# Altium PCB PCB_BearlyML Carrier Board_2022-12-21.pcbdoc (part 1 of 2)
Units mm, origin at the board's own origin, x right, y up, seen from the top; angles counter-clockwise.
Board outline 241.4 x 137.4 mm, 2 copper layers (Top Layer, Bottom Layer); 88 components, 113 nets, 672 pads, 238 vias.
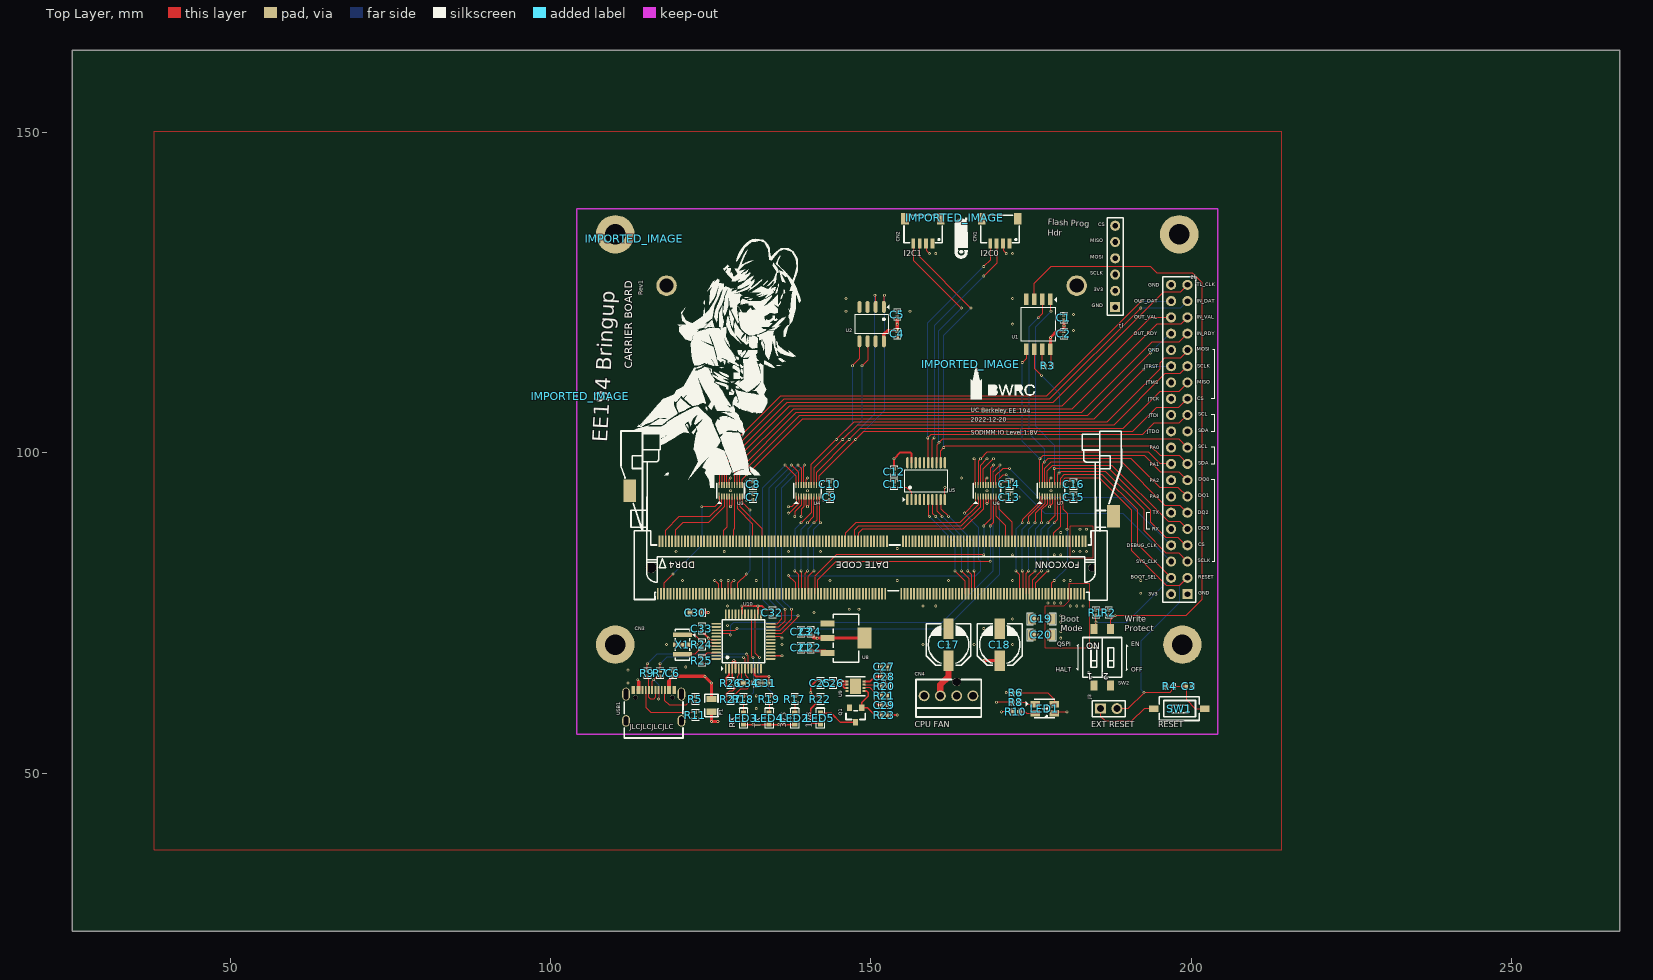
[diagram p0: Top Layer view]
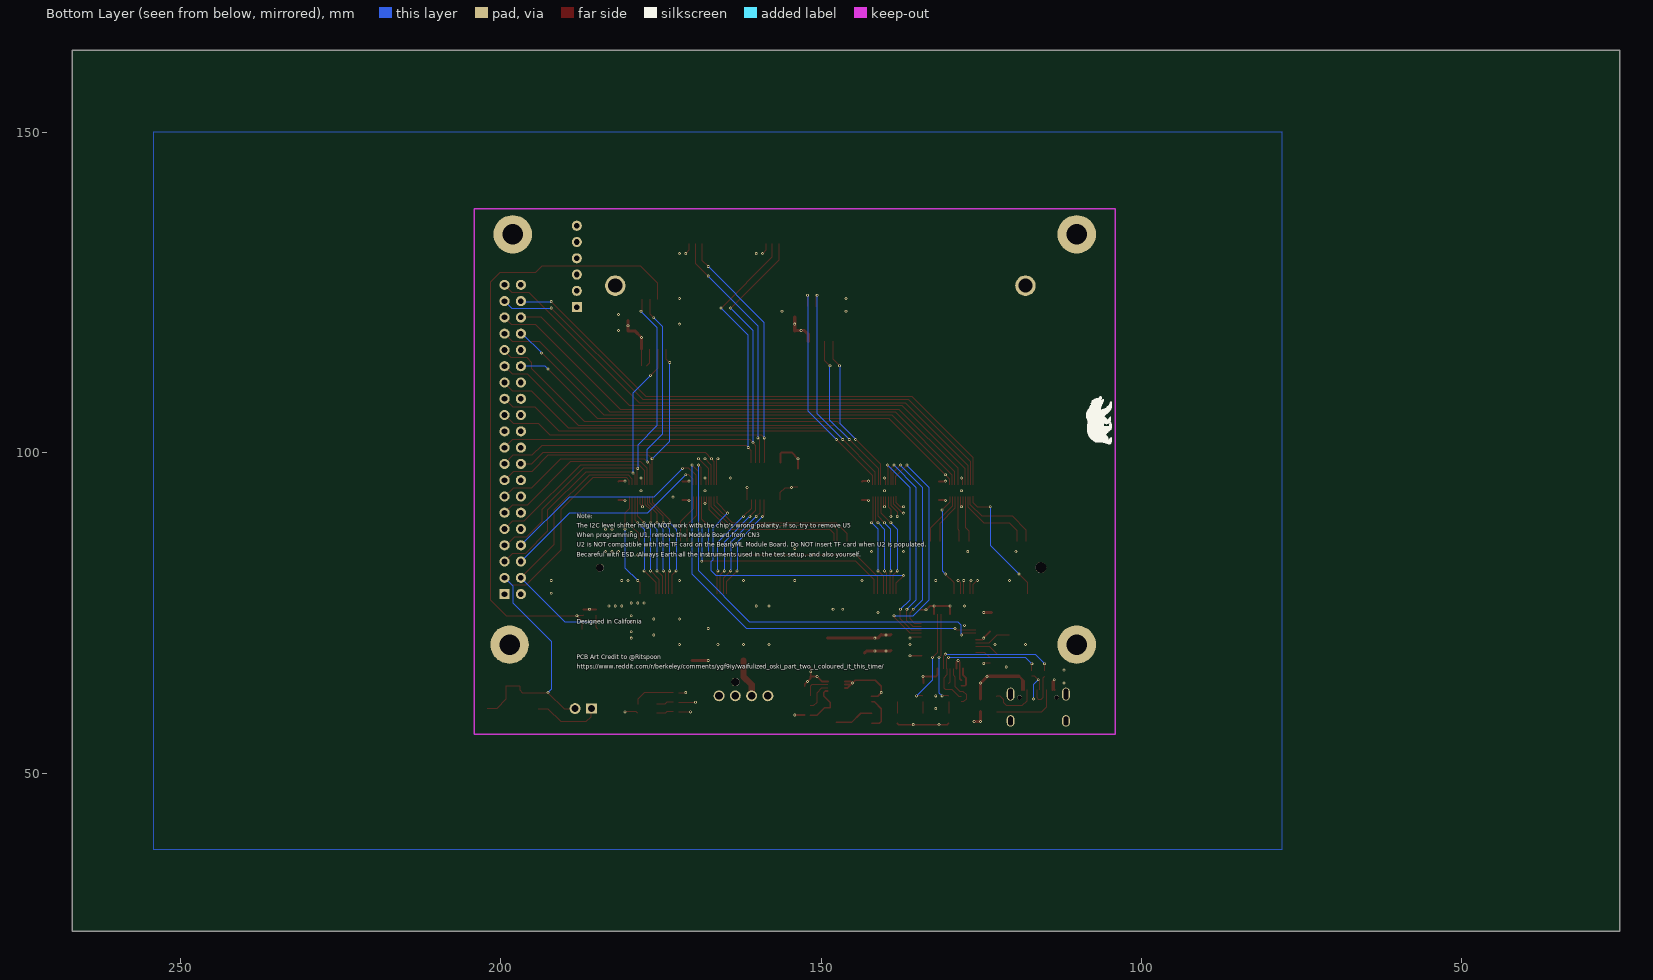
[diagram p1: Bottom Layer view, seen from below]

## Layer stack, top to bottom
Top Layer: signal copper (thickness not stored)
Dielectric: dielectric 0.32, FR-4, Dk 4.8
Bottom Layer: signal copper (thickness not stored)

## Board outline
266.8,25.4 25.4,25.4 25.4,162.8 266.8,162.8

## Components (designator, comment, footprint, x,y, rotation, side; value= is the part's Value field where it differs from the comment)
C1 "100n" CAPA-0402 180.098,121.101 r270 top
C2 "1u" CAPA-0402 180.098,118.601 r90 top
C3 "100n" CAPA-0402 199.599,63.6 r180 top
C4 "100n" CAPA-0402 154.1,118.6 r90 top
C5 "1u" CAPA-0402 154.1,121.6 r270 top
C6 "10n" CAPA-0402 119.099,65.599 r270 top
C7 "100n" CAPA-0402 131.601,93.1 r270 top
C8 "100n" CAPA-0402 131.601,95.099 r90 top
C9 "100n" CAPA-0402 143.6,93.1 r270 top
C10 "100n" CAPA-0402 143.6,95.099 r90 top
C11 "100n" CAPA-0402 153.6,95.099 r270 top
C12 "100n" CAPA-0402 153.6,97.1 r90 top
C13 "100n" CAPA-0402 171.601,93.1 r270 top
C14 "100n" CAPA-0402 171.601,95.099 r90 top
C15 "100n" CAPA-0402 181.601,93.1 r270 top
C16 "100n" CAPA-0402 181.601,95.099 r90 top
C17 "220u" CAPPR5.0-D6.3_L6.6_W6.6 162.099,70.1 r270 top
C18 "220u" CAPPR5.0-D6.3_L6.6_W6.6 170.1,70.1 r270 top
C19 "22u" CAPA-1206 176.6,74.1 r0 top
C20 "22u" CAPA-1206 176.6,71.601 r0 top
C21 "100n" CAPA-0402 139.099,69.6 r270 top
C22 "10u" CAPA-0402 140.6,69.6 r270 top
C23 "10u" CAPA-0402 139.099,72.099 r270 top
C24 "100n" CAPA-0402 140.6,72.099 r270 top
C25 "10u" CAPA-0402 142.099,64.1 r90 top
C26 "100n" CAPA-0402 144.1,64.1 r90 top
C27 "100n" CAPA-0402 152.099,66.6 r180 top
C28 "10u" CAPA-0402 152.099,65.099 r180 top
C29 "1n" CAPA-0402 152.099,60.6 r180 top
C30 "10u" CAPA-0603 122.599,75.099 r0 top
C31 "100n" CAPA-0402 133.6,64.1 r0 top
C32 "100n" CAPA-0402 134.601,75.099 r90 top
C33 "100n" CAPA-0402 123.6,72.599 r270 top
C34 "33n" CAPA-0603 130.849,64.1 r180 top
CN1 "SM04B-SRSS-TB(LF)(SN)" CONN-SMD_4P-P1.00_SM04B-SRSS-TB-LF-SN 170.099,134.601 r180 top
CN2 "SM04B-SRSS-TB(LF)(SN)" CONN-SMD_4P-P1.00_SM04B-SRSS-TB-LF-SN 158.101,134.601 r180 top
CN3 "ASAA826-E8SB0-7H" CONN-SMD_ASAA826-E8SB0-7H 150.1,82.1 r180 top
CN4 "47053-1000" CONN-TH_47053-1000 162.099,62.099 r180 top
F1 "6V 2A" R0805 125.1,60.6 r270 top
IMPORTED_IMAGE "IMPORTED_IMAGE" IMPORTED_IMAGE 104.616,108.831 r0 top
IMPORTED_IMAGE "IMPORTED_IMAGE" IMPORTED_IMAGE 165.6,113.85 r0 top
IMPORTED_IMAGE "IMPORTED_IMAGE" IMPORTED_IMAGE 113.063,133.452 r0 top
IMPORTED_IMAGE "IMPORTED_IMAGE" IMPORTED_IMAGE 163.068,136.714 r0 top
J1 "HDR-M-2.54_1x6" HDR-M-2.54_1X6 188.101,129.099 r90 top
J2 "HDR-M-2.54_2x20" HDR-M-2.54_2X20 198.101,102.099 r90 top
J3 "HDR-M-2.54_1x2" HDR-M-2.54_1X2 187.1,60.1 r0 top
LED1 "LED-RGB" LED-ARRAY-SMD_4P-L3.2-W2.7-TL-RD_TJ-S3528 177.1,60.1 r0 top
LED2 "LED-0603_R" LED-0603 138.101,58.599 r90 top
LED3 "LED-0603_W" LED-0603 130.1,58.599 r90 top
LED4 "LED-0603_W" LED-0603 134.1,58.599 r90 top
LED5 "LED-0603_B" LED-0603 142.099,58.599 r90 top
Q1 "FDV301N" SOT-23_L2.9-W1.3-P1.90-LS2.4-BR 147.6,59.1 r90 top
R1 "10k" RES-0402 185.101,75.099 r90 top
R2 "10k" RES-0402 187.1,75.099 r90 top
R3 "10k" RES-0402 177.598,113.6 r0 top
R4 "10k" RES-0402 196.6,63.6 r0 top
R5 "5k1" RES-0402 122.599,61.601 r270 top
R6 "1k" RES-0402 172.599,62.599 r180 top
R7 "27R" RES-0402 117.1,65.6 r90 top
R8 "1k" RES-0402 172.599,61.101 r180 top
R9 "27R" RES-0402 115.101,65.599 r90 top
R10 "1k" RES-0402 172.599,59.6 r180 top
R11 "5k1" RES-0402 122.599,59.099 r270 top
R17 "1k" RES-0402 138.101,61.601 r270 top
R18 "1k" RES-0402 130.1,61.601 r270 top
R19 "1k" RES-0402 134.1,61.601 r270 top
R20 "160k" RES-0402 152.099,63.6 r0 top
R21 "47k" RES-0402 152.099,62.099 r180 top
R22 "1k" RES-0402 142.099,61.601 r90 top
R23 "10k" RES-0402 152.099,59.099 r0 top
R24 "1M" RES-0402 123.6,70.1 r270 top
R25 "470R" RES-0402 123.6,67.601 r90 top
R26 "10k" RES-0402 128.101,64.1 r270 top
R27 "1k5" RES-0402 128.101,61.601 r270 top
SW1 "TS-1007S-AR02516" SW-SMD_L6.1-W3.6-LS7.9 198.1,60.1 r180 top
SW2 "KF1027B-02P-L00-ON-01B" SW-SMD_4P-L6.1-W6.2-P2.54-LS10.0 186.1,68.1 r0 top
U1 "IS25LP032D-JBLA3" SOIC-8_L5.3-W5.3-P1.27-LS7.9-BL 176.1,120.1 r180 top
U2 "APS6404L-3SQR-SN" SOP-8_L4.9-W3.9-P1.27-LS6.0-BL 150.1,120.099 r180 top
U3 "TXB0108DQSR" SON-20_L4.0-W2.0-P0.40-BL 128.1,94.099 r0 top
U4 "TXB0108DQSR" SON-20_L4.0-W2.0-P0.40-BL 140.099,94.099 r0 top
U5 "TXS0108EPWR" TSSOP-20_L6.5-W4.4-P0.65-LS6.4-BL 158.599,95.599 r0 top
U6 "TXB0108DQSR" SON-20_L4.0-W2.0-P0.40-BL 168.1,94.099 r0 top
U7 "TXB0108DQSR" SON-20_L4.0-W2.0-P0.40-BL 178.1,94.099 r0 top
U8 "AMS1117-3.3" SOT-223_L6.5_W3.5_P2.30_BL 146.099,71.101 r270 top
U9 "MCP1726-ADJE/MF" DFN-8_L3.0-W3.0-P0.50-LS3.0-BL-EP 147.599,63.601 r270 top
U10 "FT2232D" LQFP-48_L7.0-W7.0-P0.50-LS9.0-BL 130.1,70.6 r0 top
USB1 "USB-TYPEC" USB-C-SMD_KH-TYPE-C-16P 116.1,60.6 r0 top
X1 "6MHz" CRYSTAL-SMD_3P-L4.5-W2.0-L 120.6,70.1 r270 top

## Footprints (in the part's own frame and the unit in brackets; to place one, negate y for a bottom-side part, rotate by r counter-clockwise, add the part's x,y. Pads: shape width x height; smd on the part's side, far side on the other; paste and mask are expansions set on the pad)
CAPA-0402 [mm]
  rect 0.566x0.54 smd: 1(-0.433,0) 2(0.433,0)
  silkscreen extent -0.87,-0.5 0.87,0.5
CAPA-0603 [mm]
  rect 0.9x0.8 smd: 1(-0.8,0) 2(0.8,0)
  silkscreen extent -1.5,-0.62 1.5,0.62
CAPA-1206 [mm]
  rect 1.208x1.701 smd: 1(-1.479,0) 2(1.479,0)
  silkscreen extent -2.25,-1 2.25,1
CAPPR5.0-D6.3_L6.6_W6.6 [mm]
  rect 3.2x1.6 smd: 1(2.5,0) 2(-2.5,0)
  silkscreen extent -3.25,-3.5 3.25,3.5
CONN-SMD_4P-P1.00_SM04B-SRSS-TB-LF-SN [mm]
  rect 0.6x1.55 smd: 1(-1.5,1.938) 2(-0.5,1.938) 3(0.501,1.938) 4(1.5,1.938)
  rect 1.2x1.8 smd: 5(2.8,-1.938) 6(-2.8,-1.938)
  silkscreen extent -3.02,-2.46 2.96,1.8
CONN-SMD_ASAA826-E8SB0-7H [mm]
  rect 0.3x1.8 smd: 1(33.375,4.1) 2(33.125,-4.1) 3(32.875,4.1) 4(32.625,-4.1) 5(32.375,4.1) 6(32.125,-4.1) 7(31.875,4.1) 8(31.625,-4.1) 9(31.375,4.1) 10(31.125,-4.1) 11(30.875,4.1) 12(30.625,-4.1) 13(30.375,4.1) 14(30.125,-4.1) 15(29.875,4.1) 16(29.625,-4.1) 17(29.375,4.1) 18(29.125,-4.1) 19(28.875,4.1) 20(28.625,-4.1) 21(28.375,4.1) 22(28.125,-4.1) 23(27.875,4.1) 24(27.625,-4.1) 25(27.375,4.1) 26(27.125,-4.1) 27(26.875,4.1) 28(26.625,-4.1) 29(26.375,4.1) 30(26.125,-4.1) 31(25.875,4.1) 32(25.625,-4.1) 33(25.375,4.1) 34(25.125,-4.1) 35(24.875,4.1) 36(24.625,-4.1) 37(24.375,4.1) 38(24.125,-4.1) 39(23.875,4.1) 40(23.625,-4.1) 41(23.375,4.1) 42(23.125,-4.1) 43(22.875,4.1) 44(22.625,-4.1) 45(22.375,4.1) 46(22.125,-4.1) 47(21.875,4.1) 48(21.625,-4.1) 49(21.375,4.1) 50(21.125,-4.1) 51(20.875,4.1) 52(20.625,-4.1) 53(20.375,4.1) 54(20.125,-4.1) 55(19.875,4.1) 56(19.625,-4.1) 57(19.375,4.1) 58(19.125,-4.1) 59(18.875,4.1) 60(18.625,-4.1) 61(18.375,4.1) 62(18.125,-4.1) 63(17.875,4.1) 64(17.625,-4.1) 65(17.375,4.1) 66(17.125,-4.1) 67(16.875,4.1) 68(16.625,-4.1) 69(16.375,4.1) 70(16.125,-4.1) 71(15.875,4.1) 72(15.625,-4.1) 73(15.375,4.1) 74(15.125,-4.1) 75(14.875,4.1) 76(14.625,-4.1) 77(14.375,4.1) 78(14.125,-4.1) 79(13.875,4.1) 80(13.625,-4.1) 81(13.375,4.1) 82(13.125,-4.1) 83(12.875,4.1) 84(12.625,-4.1) 85(12.375,4.1) 86(12.125,-4.1) 87(11.875,4.1) 88(11.625,-4.1) 89(11.375,4.1) 90(11.125,-4.1) 91(10.875,4.1) 92(10.625,-4.1) 93(10.375,4.1) 94(10.125,-4.1) 95(9.875,4.1) 96(9.625,-4.1) 97(9.375,4.1) 98(9.125,-4.1) 99(8.875,4.1) 100(8.625,-4.1) 101(8.375,4.1) 102(8.125,-4.1) 103(7.875,4.1) 104(7.625,-4.1) 105(7.375,4.1) 106(7.125,-4.1) 107(6.875,4.1) 108(6.625,-4.1) 109(6.375,4.1) 110(6.125,-4.1) 111(5.875,4.1) 112(5.625,-4.1) 113(5.375,4.1) 114(5.125,-4.1) 115(4.875,4.1) 116(4.625,-4.1) 117(4.375,4.1) 118(4.125,-4.1) 119(3.875,4.1) 120(3.625,-4.1) 121(3.375,4.1) 122(3.125,-4.1) 123(2.875,4.1) 124(2.625,-4.1) 125(2.375,4.1) 126(2.125,-4.1) 127(1.875,4.1) 128(1.625,-4.1) 129(1.375,4.1) 130(1.125,-4.1) 131(0.875,4.1) 132(0.625,-4.1) 133(0.375,4.1) 134(0.125,-4.1) 135(-0.125,4.1) 136(-0.375,-4.1) 137(-0.625,4.1) 138(-0.875,-4.1) 139(-1.125,4.1) 140(-1.375,-4.1) 141(-1.625,4.1) 142(-1.875,-4.1) 143(-2.125,4.1) 144(-2.375,-4.1) 145(-4.625,4.1) 146(-4.875,-4.1) 147(-5.125,4.1) 148(-5.375,-4.1) 149(-5.625,4.1) 150(-5.875,-4.1) 151(-6.125,4.1) 152(-6.375,-4.1) 153(-6.625,4.1) 154(-6.875,-4.1) 155(-7.125,4.1) 156(-7.375,-4.1) 157(-7.625,4.1) 158(-7.875,-4.1) 159(-8.125,4.1) 160(-8.375,-4.1) 161(-8.625,4.1) 162(-8.875,-4.1) 163(-9.125,4.1) 164(-9.375,-4.1) 165(-9.625,4.1) 166(-9.875,-4.1) 167(-10.125,4.1) 168(-10.375,-4.1) 169(-10.625,4.1) 170(-10.875,-4.1) 171(-11.125,4.1) 172(-11.375,-4.1) 173(-11.625,4.1) 174(-11.875,-4.1) 175(-12.125,4.1) 176(-12.375,-4.1) 177(-12.625,4.1) 178(-12.875,-4.1) 179(-13.125,4.1) 180(-13.375,-4.1) 181(-13.625,4.1) 182(-13.875,-4.1) 183(-14.125,4.1) 184(-14.375,-4.1) 185(-14.625,4.1) 186(-14.875,-4.1) 187(-15.125,4.1) 188(-15.375,-4.1) 189(-15.625,4.1) 190(-15.875,-4.1) 191(-16.125,4.1) 192(-16.375,-4.1) 193(-16.625,4.1) 194(-16.875,-4.1) 195(-17.125,4.1) 196(-17.375,-4.1) 197(-17.625,4.1) 198(-17.875,-4.1) 199(-18.125,4.1) 200(-18.375,-4.1) 201(-18.625,4.1) 202(-18.875,-4.1) 203(-19.125,4.1) 204(-19.375,-4.1) 205(-19.625,4.1) 206(-19.875,-4.1) 207(-20.125,4.1) 208(-20.375,-4.1) 209(-20.625,4.1) 210(-20.875,-4.1) 211(-21.125,4.1) 212(-21.375,-4.1) 213(-21.625,4.1) 214(-21.875,-4.1) 215(-22.125,4.1) 216(-22.375,-4.1) 217(-22.625,4.1) 218(-22.875,-4.1) 219(-23.125,4.1) 220(-23.375,-4.1) 221(-23.625,4.1) 222(-23.875,-4.1) 223(-24.125,4.1) 224(-24.375,-4.1) 225(-24.625,4.1) 226(-24.875,-4.1) 227(-25.125,4.1) 228(-25.375,-4.1) 229(-25.625,4.1) 230(-25.875,-4.1) 231(-26.125,4.1) 232(-26.375,-4.1) 233(-26.625,4.1) 234(-26.875,-4.1) 235(-27.125,4.1) 236(-27.375,-4.1) 237(-27.625,4.1) 238(-27.875,-4.1) 239(-28.125,4.1) 240(-28.375,-4.1) 241(-28.625,4.1) 242(-28.875,-4.1) 243(-29.125,4.1) 244(-29.375,-4.1) 245(-29.625,4.1) 246(-29.875,-4.1) 247(-30.125,4.1) 248(-30.375,-4.1) 249(-30.625,4.1) 250(-30.875,-4.1) 251(-31.125,4.1) 252(-31.375,-4.1) 253(-31.625,4.1) 254(-31.875,-4.1) 255(-32.125,4.1) 256(-32.375,-4.1) 257(-32.625,4.1) 258(-32.875,-4.1) 259(-33.125,4.1) 260(-33.375,-4.1)
  rect 2x3.5 smd: 261(37.75,-12) 262(-37.75,-8)
  round 1.2 hole 1.2 unplated: ""(-34.4,0)
  round 1.7 hole 1.7 unplated: ""(34.4,0)
  silkscreen extent -38.98,-21.33 39.11,5.1
CONN-TH_47053-1000 [mm]
  round 1.7 hole 1.2: 1(3.81,0) 2(1.27,0) 3(-1.27,0) 4(-3.81,0)
  round 1.3 hole 1.3 unplated: ""(-1.27,-2.16)
  silkscreen extent -5.08,-2.54 5.08,3.3
CRYSTAL-SMD_3P-L4.5-W2.0-L [mm]
  rect 0.7x3 smd: 1(-1.5,0) 2(0,0) 3(1.5,0)
  silkscreen extent -2.41,-1.14 2.41,2
DFN-8_L3.0-W3.0-P0.50-LS3.0-BL-EP [mm]
  rect 0.3x0.5 smd: 1(-0.75,-1.325) 2(-0.25,-1.325) 3(0.25,-1.325) 4(0.75,-1.325) 5(0.75,1.325) 6(0.25,1.325) 7(-0.25,1.325) 8(-0.75,1.325)
  rect 2.4x1.7 smd: 9(0,-0.025)
  silkscreen extent -1.5,-2.25 1.5,1.48
HDR-M-2.54_1X2 [mm]
  rect 1.7x1.575 hole 1.1: 1(-1.27,0)
  round 1.7 hole 1.1: 2(1.27,0)
  silkscreen extent -2.54,-1.27 2.54,1.27
HDR-M-2.54_1X6 [mil]
  rect 62x62 hole 35: 1(-250,0)
  round 62 hole 35: 2(-150,0) 3(-50,0) 4(50,0) 5(150,0) 6(250,0)
  silkscreen extent -300,-50 300,50
HDR-M-2.54_2X20 [mil]
  rect 62x62 hole 35: 1(-950,-50)
  round 62 hole 35: 2(-950,50) 3(-850,-50) 4(-850,50) 5(-750,-50) 6(-750,50) 7(-650,-50) 8(-650,50) 9(-550,-50) 10(-550,50) 11(-450,-50) 12(-450,50) 13(-350,-50) 14(-350,50) 15(-250,-50) 16(-250,50) 17(-150,-50) 18(-150,50) 19(-50,-50) 20(-50,50) 21(50,-50) 22(50,50) 23(150,-50) 24(150,50) 25(250,-50) 26(250,50) 27(350,-50) 28(350,50) 29(450,-50) 30(450,50) 31(550,-50) 32(550,50) 33(650,-50) 34(650,50) 35(750,-50) 36(750,50) 37(850,-50) 38(850,50) 39(950,-50) 40(950,50)
  silkscreen extent -1000,-100 1000,100
IMPORTED_IMAGE [mm]
LED-0603 [mm]
  rect 0.9x0.8 smd: 1(-0.8,0) 2(0.8,0)
  silkscreen extent -1.51,-0.69 1.7,0.69
LED-ARRAY-SMD_4P-L3.2-W2.7-TL-RD_TJ-S3528 [mm]
  rect 1.5x1 smd: 1(-1.5,0.7) 2(-1.5,-0.7) 3(1.5,0.7) 4(1.5,-0.7)
  silkscreen extent -2.94,-1.44 1.61,1.44
LQFP-48_L7.0-W7.0-P0.50-LS9.0-BL [mm]
  oval 0.27x1.5 smd: 1(-2.75,-4.25) 2(-2.25,-4.25) 3(-1.75,-4.25) 4(-1.25,-4.25) 5(-0.75,-4.25) 6(-0.25,-4.25) 7(0.25,-4.25) 8(0.75,-4.25) 9(1.25,-4.25) 10(1.75,-4.25) 11(2.25,-4.25) 12(2.75,-4.25) 25(2.75,4.25) 26(2.25,4.25) 27(1.75,4.25) 28(1.25,4.25) 29(0.75,4.25) 30(0.25,4.25) 31(-0.25,4.25) 32(-0.75,4.25) 33(-1.25,4.25) 34(-1.75,4.25) 35(-2.25,4.25) 36(-2.75,4.25)
  oval 1.5x0.27 smd: 13(4.25,-2.75) 14(4.25,-2.25) 15(4.25,-1.75) 16(4.25,-1.25) 17(4.25,-0.75) 18(4.25,-0.25) 19(4.25,0.25) 20(4.25,0.75) 21(4.25,1.25) 22(4.25,1.75) 23(4.25,2.25) 24(4.25,2.75) 37(-4.25,2.75) 38(-4.25,2.25) 39(-4.25,1.75) 40(-4.25,1.25) 41(-4.25,0.75) 42(-4.25,0.25) 43(-4.25,-0.25) 44(-4.25,-0.75) 45(-4.25,-1.25) 46(-4.25,-1.75) 47(-4.25,-2.25) 48(-4.25,-2.75)
  silkscreen extent -3.5,-4.62 3.3,3.34
R0805 [mm]
  rect 1x1.55 smd: 1(-1,0) 2(1,0)
  silkscreen extent -1.75,-1.02 1.75,1.02
RES-0402 [mm]
  rect 0.566x0.54 smd: 1(-0.433,0) 2(0.433,0)
  silkscreen extent -0.87,-0.5 0.87,0.5
SOIC-8_L5.3-W5.3-P1.27-LS7.9-BL [mm]
  rect 0.7x1.8 smd: 1(-1.905,-3.9) 2(-0.635,-3.9) 3(0.635,-3.9) 4(1.905,-3.9) 5(1.905,3.9) 6(0.635,3.9) 7(-0.635,3.9) 8(-1.905,3.9)
  silkscreen extent -2.85,-4.18 2.65,2.65
SON-20_L4.0-W2.0-P0.40-BL [mm]
  rect 0.2x1.1 smd: 1(-1.8,-0.85)
  rect 0.2x1 smd: 2(-1.4,-0.9) 3(-1,-0.9) 4(-0.6,-0.9) 5(-0.2,-0.9) 6(0.2,-0.9) 7(0.6,-0.9) 8(1,-0.9) 9(1.4,-0.9) 10(1.8,-0.9) 11(1.8,0.9) 12(1.4,0.9) 13(1,0.9) 14(0.6,0.9) 15(0.2,0.9) 16(-0.2,0.9) 17(-0.6,0.9) 18(-1,0.9) 19(-1.4,0.9) 20(-1.8,0.9)
  silkscreen extent -2.16,-2 2.16,1.14
SOP-8_L4.9-W3.9-P1.27-LS6.0-BL [mm]
  oval 0.63x1.865 smd: 1(-1.905,-2.682) 2(-0.635,-2.682) 3(0.635,-2.682) 4(1.905,-2.682) 5(1.905,2.682) 6(0.635,2.682) 7(-0.635,2.682) 8(-1.905,2.682)
  silkscreen extent -2.72,-3.04 2.58,1.52
SOT-23_L2.9-W1.3-P1.90-LS2.4-BR [mm]
  rect 1x0.8 smd: 1(1.15,-0.95) 2(1.15,0.95) 3(-1.15,0)
  silkscreen extent -0.7,-1.5 0.7,1.5
SOT-223_L6.5_W3.5_P2.30_BL [mm]
  rect 0.95x2.15 smd: 1(-2.3,-2.9) 2(0,-2.9) 3(2.3,-2.9)
  rect 3.25x2.2 smd: 2(0,2.9)
  silkscreen extent -3.75,-2 3.75,2
SW-SMD_4P-L6.1-W6.2-P2.54-LS10.0 [mm]
  rect 1.1x1.524 smd: 1(-1.27,-4.409) 2(1.27,-4.409) 3(1.27,4.409) 4(-1.27,4.409)
  silkscreen extent -3.04,-3.13 3.04,3.1
SW-SMD_L6.1-W3.6-LS7.9 [mm]
  rect 1.5x1 smd: 1(-3.95,0) 2(3.95,0)
  silkscreen extent -3.1,-1.85 3.1,1.85
TSSOP-20_L6.5-W4.4-P0.65-LS6.4-BL [mm]
  oval 0.364x1.742 smd: 1(-2.925,-2.871) 2(-2.275,-2.871) 3(-1.625,-2.871) 4(-0.975,-2.871) 5(-0.325,-2.871) 6(0.325,-2.871) 7(0.975,-2.871) 8(1.625,-2.871) 9(2.275,-2.871) 10(2.925,-2.871) 11(2.925,2.871) 12(2.275,2.871) 13(1.625,2.871) 14(0.975,2.871) 15(0.325,2.871) 16(-0.325,2.871) 17(-0.975,2.871) 18(-1.625,2.871) 19(-2.275,2.871) 20(-2.925,2.871)
  silkscreen extent -3.63,-3.25 3.33,1.77
USB-C-SMD_KH-TYPE-C-16P [mm]
  oval 1.2x2 hole 0.7 slot 1.7 at 90 deg: 1(-4.32,1.765) 2(4.32,1.765)
  oval 1.2x1.8 hole 0.7 slot 1.4 at 90 deg: 3(-4.32,-2.415) 4(4.32,-2.415)
  rect 0.3x1.3 smd: A1(-3.35,2.415) A4(-2.55,2.415) A5(-1.25,2.415) A6(-0.25,2.415) A7(0.25,2.415) A8(1.25,2.415) A9(2.55,2.415) A12(3.35,2.415) B1(3.05,2.415) B4(2.25,2.415) B5(1.75,2.415) B6(0.75,2.415) B7(-0.75,2.415) B8(-1.75,2.415) B9(-2.25,2.415) B12(-3.05,2.415)
  round 0.7 hole 0.7 unplated: ""(-2.89,1.235) ""(2.89,1.235)
  silkscreen extent -4.57,-5.08 4.57,0.57

## Free pads (board coordinates)
  round 6 hole 3.2: 1(110.1,70.1) 1(110.1,134.1) 2(198.1,134.1) 2(198.6,70.1)
  round 3.2 hole 2.2: 1(118.1,126.1) 1(182.1,126.1)

## Via types
v1: diameter 0.45, hole 0.2, Top Layer to Bottom Layer, tented both sides, 238 vias

## Nets (pads, with @x,y where several pads share a name; then routed paths per layer and width w, separated by ;. In a path a pad name is that pad's centre, name@x,y a point inside that pad or via, vN(x,y) a via of type N, cw(c..) or ccw(c..) an arc to the next point about the centre after c; other vN are vias at no path point)
1V8: C7.2 C9.2 C11.2 C13.2 C15.2 C19.2 C20.2 C27.2 C28.2 CN3.251 CN3.253 CN3.255 CN3.257 CN3.259 R20.2 U3.5 U3.6 U4.5 U4.6 U5.2 U5.10 U6.5 U6.6 U7.5 U7.6 U9.8 | length 29.2
  Top Layer w0.15: U3.5@127.9,93.2 127.9,91.8 v1(128.1,91.6) 128.3,91.8 U3.6@128.3,93.199 ; U4.5@139.9,93.2 139.9,91.8 v1(140.1,91.6) 140.299,91.799 U4.6@140.299,93.199 ; C11.2@153.6,94.666 154.532,94.667 v1(154.599,94.599) ; v1@154.598,94.598 155.599,94.601 156.325,93.875 U5.2@156.324,92.728 ; U5.10@161.524,92.728 v1(161.524,94.6) ; U6.5@167.9,93.2 167.9,92.3 v1(168.1,92.1) 168.3,92.3 U6.6@168.3,93.199 ; U7.5@177.9,93.199 177.9,91.65 v1(177.85,91.6) 178.3,92.05 U7.6@178.3,93.199
  Top Layer w0.3: v1(130.599,92.599) 130.667,92.667 C7.2@131.601,92.667 ; v1(142.599,92.599) 142.667,92.667 C9.2@143.6,92.667 ; U9.8@148.925,64.35 149.85,64.35 v1(150.6,65.1) C28.2@151.667,65.1 ; C27.2@151.666,66.6 151.6,66.533 v1(151.6,65.85) 151.6,65.167 C28.2@151.667,65.1 ; R20.2@152.532,63.6 152.533,63.917 v1(152.1,64.35) 151.667,64.783 C28.2@151.667,65.1 ; v1(170.6,92.6) 170.667,92.667 C13.2@171.601,92.667 ; v1(180.599,92.599) 180.667,92.667 C15.2@181.601,92.667
  other v1: 179.6,71.1 179.6,72.1 179.6,73.6 179.6,74.6 181.1,76.1 182.1,76.1 183.1,76.1
3V3: C1.2 C2.2 C4.2 C5.2 C8.2 C10.2 C12.2 C14.2 C16.2 C18.1 C23.2 C24.2 C25.2 C26.2 C30.2 C31.2 C32.2 CN1.2 CN2.2 CN3.252 CN3.254 CN3.256 CN3.258 CN3.260 J1.2 J2.2 J3.1 LED1.4 LED2.1 LED3.1 LED4.1 R1.2 R2.2 R3.2 R22.2 R23.2 SW1.2 U1.8 U2.8 U3.16 U4.16 U5.19 U6.16 U7.16 U8.2 U9.1 U9.2 U9.3 U10.10 U10.14 U10.26 U10.31 | length 96.7
  Top Layer w0.15: U3.16@127.9,95 127.9,95.9 v1(128.1,96.1) ; U4.16@139.9,95 139.9,95.9 v1(140.1,96.1) ; CN2.2@158.6,132.663 158.6,131.6 v1(159.1,131.1) ; U6.16@167.9,95 167.9,95.9 v1(168.1,96.1) ; CN1.2@170.599,132.663 170.6,131.6 v1(171.1,131.1) ; U7.16@177.9,95 177.9,95.9 v1(178.1,96.1) ; U1.8@178.004,116.201 178.032,116.173 R3.2@178.032,113.601 ; LED1.4@178.6,59.4 178.8,59.6 v1(180.6,59.6) ; J3.1@185.83,60.1 185.83,58.87 186.6,58.1 190.6,58.1 192.6,60.1 SW1.2@194.15,60.1
  Top Layer w0.25: LED3.1@130.1,57.8 130.3,57.6 v1(131.6,57.6) v1(135.6,57.6) 137.9,57.6 LED2.1@138.1,57.8 ; R23.2@152.533,59.1 v1(154.1,59.1)
  Top Layer w0.3: U10.31@129.85,74.85 v1(129.85,76.1) v1(132.35,76.1) ; v1(130.599,95.599) 130.666,95.533 C8.2@131.601,95.531 ; U10.10@131.85,66.35 131.85,65.35 132.1,65.1 v1(134.1,65.1) 134.1,64.734 134.033,64.667 C31.2@134.033,64.1 ; U10.26@132.35,74.85 v1(132.35,76.1) ; U10.14@134.35,68.35 v1(136.1,68.35) ; C32.2@134.601,75.531 v1(133.6,75.533) 133.033,76.1 v1(132.35,76.1) ; R22.2@142.1,62.033 141.167,62.033 v1(140.6,62.6) 140.6,63.6 141.533,64.533 142.1,64.533 C26.2@144.1,64.533 ; v1(142.599,95.599) 143.533,95.599 C10.2@143.6,95.531 ; C26.2@144.1,64.532 144.667,64.532 145.099,64.1 145.85,63.351 U9.3@146.274,63.351 ; U9.2@146.274,63.851 145.35,63.85 v1(145.1,64.1) 145.35,64.35 U9.1@146.274,64.351 ; C12.2@153.6,97.533 v1(153.6,99.1) 154.6,100.1 156.1,100.1 156.325,99.875 U5.19@156.324,98.47 ; v1(170.6,95.6) 170.667,95.533 C14.2@171.601,95.531 ; v1(180.599,95.599) 181.533,95.599 C16.2@181.601,95.531 ; R1.2@185.101,75.531 185.167,75.6 v1(186.1,75.6) 187.033,75.6 R2.2@187.1,75.531
  Top Layer w0.5: C30.2@123.401,75.1 v1(124.6,75.1) ; C23.2@139.1,71.667 139.167,71.6 v1(139.85,71.6) 140.533,71.6 C24.2@140.6,71.666 141.167,71.1 v1(141.6,71.1) U8.2@143.199,71.101 U8.2@148.999,71.101 ; U2.8@152.005,117.416 152.005,118.505 152.6,119.1 v1(153.1,119.1) 154.033,119.1 C4.2@154.1,119.033 v1(154.1,120.1) C5.2@154.1,121.167 ; v1(167.6,67.6) C18.1@170.1,67.6 ; U1.8@178.004,116.201 v1(178.004,118.006) 179.032,119.034 C2.2@180.098,119.034 v1(180.099,119.851) C1.2@180.098,120.668
  other v1: 181.6,84.6 182.6,84.6 183.6,84.6 182.6,88.1 183.6,88.1
5V: C17.1 C21.2 C22.2 C33.2 CN4.2 F1.2 R25.1 R26.1 U8.3 U10.3 U10.4 U10.42 | length 22.2
  Top Layer w0.15: R25.1@123.6,67.168 v1(124.6,67.167)
  Top Layer w0.3: C33.2@123.6,72.166 124.6,71.167 v1(124.6,71.1) 124.85,70.85 U10.42@125.85,70.85 ; R26.1@128.101,64.533 128.35,64.783 U10.3@128.35,66.35 128.35,67.35 v1(128.6,67.6) 128.725,67.475 128.85,67.35 U10.4@128.85,66.35
  Top Layer w0.5: F1.2@125.099,59.6 v1(125.1,58.1) v1@126.099,58.101 ; v1(125.1,58.1) v1(126.1,58.1) ; C21.2@139.1,69.167 139.167,69.1 v1(139.85,69.1) v1(141.6,69.1) 142.9,69.1 U8.3@143.199,68.801
  Top Layer w1: CN4.2@160.83,62.1 160.83,63.83 162.1,65.1 C17.1@162.1,67.6
BOOT_SEL_1V8: CN3.240 U7.9 | length 7.4
  Top Layer w0.15: CN3.240@178.474,86.249 178.474,87.476 179.5,88.5 U7.9@179.5,93.199
BOOT_SEL_3V3: J2.4 R1.1 SW2.4 U7.12 | length 45.2
  Top Layer w0.15: U7.12@179.5,94.999 179.5,96 180.1,96.6 186.099,96.6 191.601,91.101 191.601,85.739 J2.4@196.831,80.509 ; SW2.4@184.83,72.509 185.1,72.779 v1(185.1,73.6) R1.1@185.101,74.666
  Bottom Layer w0.15: v1(185.1,73.6) 189.92,73.6 J2.4@196.83,80.51
C29_2: C29.2 U9.6 | length 4.8
  Top Layer w0.15: U9.6@148.925,63.35 149.85,63.35 150.6,62.6 150.6,61.1 151.1,60.6 C29.2@151.666,60.6
C34_2: C34.2 U10.6 | length 2.3
  Top Layer w0.15: U10.6@129.85,66.35 129.85,64.298 C34.2@130.049,64.1
DEBUG_CLK_1V8: CN3.210 U6.9 | length 7.6
  Top Layer w0.15: U6.9@169.5,93.2 169.5,90.2 170.975,88.725 CN3.210@170.975,86.25
DEBUG_CLK_3V3: J2.8 U6.12 | length 34.3
  Top Layer w0.15: U6.12@169.5,94.999 169.5,96.501 170.6,97.601 v1(171.6,97.6)
  Bottom Layer w0.15: v1(171.6,97.6) 176.099,93.1 189.319,93.1 J2.8@196.831,85.589
F1_1: C6.2 F1.1 USB1.A4 USB1.A9 USB1.B4 USB1.B9 | length 29.6
  Top Layer w0.3: USB1.A4@113.55,63.015 113.6,63.065 v1(113.6,64.6) 113.85,64.35 USB1.B9@113.85,63.015 ; USB1.B4@118.35,63.015 118.35,64.417 119.1,65.167 118.65,64.717 USB1.A9@118.65,63.015
  Top Layer w0.5: C6.2@119.1,65.167 124.033,65.167 v1(124.1,65.1) v1(125.1,64.1) F1.1@125.1,61.6
  Mid-Layer 3 w0.5: v1(113.6,64.6) 114.6,65.6 123.6,65.6 v1(125.1,64.1)
FLASH_WRITEPROTECT: R2.1 SW2.3 U1.3 | length 98.2
  Top Layer w0.15: U1.3@175.464,123.999 175.482,126.499 178.121,129.1 193.602,129.1 194.601,128.101 200.1,128.101 201.601,126.6 201.601,77.101 199.099,74.601 188.101,74.601 187.369,73.869 SW2.3@187.369,72.508 ; R2.1@187.1,74.666 187.167,74.6 v1(188.1,74.6)
GND: C1.1 C2.1 C3.1 C4.1 C5.1 C6.1 C7.1 C8.1 C9.1 C10.1 C11.1 C12.1 C13.1 C14.1 C15.1 C16.1 C17.2 C18.2 C19.1 C20.1 C21.1 C22.1 C23.1 C24.1 C25.1 C26.1 C27.1 C28.1 C29.1 C30.1 C31.1 C32.1 C33.1 C34.1 CN1.1 CN1.5 CN1.6 CN2.1 CN2.5 CN2.6 CN3.1 CN3.2 CN3.3 CN3.4 CN3.7 CN3.8 CN3.10 CN3.13 CN3.14 CN3.19 CN3.20 CN3.25 CN3.26 CN3.31 CN3.32 CN3.37 CN3.38 CN3.40 CN3.43 CN3.44 CN3.46 CN3.49 CN3.50 CN3.55 CN3.56 CN3.58 CN3.61 CN3.62 CN3.64 CN3.67 CN3.68 CN3.73 CN3.74 CN3.79 CN3.80 CN3.85 CN3.86 CN3.102 CN3.107 CN3.113 CN3.119 CN3.125 CN3.129 CN3.132 CN3.135 CN3.138 CN3.141 CN3.144 CN3.146 CN3.147 CN3.152 CN3.153 CN3.158 CN3.159 CN3.164 CN3.165 CN3.170 CN3.171 CN3.176 CN3.177 CN3.200 CN3.201 CN3.217 CN3.231 CN3.241 CN3.242 CN3.243 CN3.244 CN3.245 CN3.246 CN3.247 CN3.248 CN3.249 CN3.250 CN3.261 CN3.262 CN4.1 J1.1 J2.1 J2.32 J2.40 pad.1@110.1,70.1 pad.1@110.1,134.1 pad.2 Q1.2 R4.1 R5.2 R11.2 R17.1 R21.1 SW2.1 SW2.2 U1.4 U2.4 U3.15 U4.15 U5.11 U6.15 U7.15 U8.1 U9.4 U9.9 U10.9 U10.18 U10.25 U10.34 U10.45 U10.47 USB1.1 USB1.2 USB1.3 USB1.4 USB1.A1 USB1.A12 USB1.B1 USB1.B12 X1.2
  other v1: 132.1,60.1 132.1,62.1 112.1,64.1 112.1,66.1 121.1,66.6 118.1,70.1 122.85,70.1 136.1,70.1 158.1,70.1 162.1,70.1 166.1,70.1 172.1,70.1 176.1,71.6 167.6,72.6 127.6,73.1 172.1,74.1 176.1,74.1 141.1,75.1 146.6,75.6 148.1,75.6 127.6,76.1 158.1,76.1 160.1,76.1 177.6,76.6 178.6,76.6 179.6,76.6 192.1,78.1 120.6,80.1 132.1,80.1 143.6,80.1 154.1,80.1 162.1,80.1 172.1,80.1 180.1,80.1 181.1,80.1 192.1,80.1 172.1,84.1 178.6,84.1 179.6,84.1 119.6,84.6 127.1,84.6 137.1,84.6 142.1,84.6 154.1,85.1 179.6,87.6 173.1,93.1 128.1,94.1 140.1,94.1 168.1,94.1 178.1,94.1 164.1,96.1 181.599,119.101 172.099,120.101 181.599,121.601 146.1,122.1 156.1,122.1 146.1,124.1 172.099,124.101 160.1,131.1 172.1,131.1
GPIO_PA0_1V8: CN3.87 U6.1 | length 47
  Top Layer w0.15: v1(137.1,80.85) 138.225,79.725 CN3.87@138.225,78.05 ; v1(164.6,90.6) 166.3,92.3 U6.1@166.3,93.249
  Bottom Layer w0.15: v1@137.1,80.849 166.351,80.849 167.1,81.601 167.1,83.1 166.849,83.351 166.849,88.35 v1(164.6,90.6)
GPIO_PA0_3V3: J2.20 U6.20 | length 36.3
  Top Layer w0.15: v1(166.1,99.1) 166.3,98.9 U6.20@166.3,95
  Mid-Layer 1 w0.15: v1(166.1,99.1) 168.6,101.6 194.1,101.6 194.87,100.83 J2.20@196.83,100.83
GPIO_PA1_1V8: CN3.118 U6.2 | length 25.1
  Top Layer w0.15: CN3.118@145.975,86.249 145.975,87.476 147.598,89.099 163.849,89.099 166.699,91.949 U6.2@166.699,93.199
GPIO_PA1_3V3: J2.18 R8.2 U6.19 | length 78
  Top Layer w0.15: U6.19@166.699,95 166.699,98.699 v1(167.1,99.1) 168.1,100.1 193.351,100.1 195.159,98.289 J2.18@196.831,98.289 ; v1(169.6,61.1) R8.2@172.166,61.101
  Mid-Layer 1 w0.15: v1@167.1,99.099 165.599,97.601 165.599,87.601 169.599,83.6 v1@169.599,61.101
GPIO_PA2_1V8: CN3.124 U6.3 | length 24.5
  Top Layer w0.15: CN3.124@147.476,86.249 147.476,87.976 148.098,88.599 164.098,88.599 167.1,91.601 U6.3@167.1,93.199
GPIO_PA2_3V3: J2.16 R10.2 U6.18 | length 79.8
  Top Layer w0.15: U6.18@167.1,95 167.1,98.1 v1(168.1,99.1) ; v1(170.35,59.6) R10.2@172.166,59.6
  Mid-Layer 1 w0.15: v1@170.349,59.6 170.349,83.849 166.351,87.849 166.351,97.349 168.101,99.099 169.852,100.85 191.73,100.85 J2.16@196.831,95.749
GPIO_PA3_1V8: CN3.126 U6.4 | length 24.3
  Top Layer w0.15: CN3.126@147.974,86.249 147.974,87.476 148.599,88.101 164.352,88.101 167.499,91.248 U6.4@167.499,93.199
GPIO_PA3_3V3: J2.14 R6.2 U6.17 | length 75.8
  Top Layer w0.15: U6.17@167.5,95 167.5,97.5 v1(169.1,99.1) ; v1(171.1,62.6) R6.2@172.167,62.6
  Mid-Layer 1 w0.15: v1(171.1,62.6) 171.1,84.1 167.1,88.1 167.1,97.1 v1(169.1,99.1) 170.1,100.1 189.94,100.1 J2.14@196.831,93.209
I2C0_SCL_1V8: CN3.185 U5.6 | length 17.1
  Top Layer w0.15: U5.6@158.925,92.729 158.925,90.275 v1(159.1,90.1) ; v1(163.1,81.6) 164.725,79.975 CN3.185@164.725,78.05
  Bottom Layer w0.15: v1(159.1,90.1) 163.1,86.1 v1(163.1,81.6)
I2C0_SCL_3V3: CN1.4 J2.23 U5.15 | length 80.3
  Top Layer w0.15: U5.15@158.925,98.471 158.85,98.546 v1(158.85,102.35) 159.35,102.85 192.35,102.85 194.1,104.6 198.06,104.6 J2.23@199.37,105.91 ; v1(167.6,129.1) 168.599,130.099 CN1.4@168.599,132.662
  Bottom Layer w0.15: v1(158.85,102.35) 158.85,120.35 v1(167.6,129.1)
I2C0_SDA_1V8: CN3.187 U5.7 | length 17
  Top Layer w0.15: U5.7@159.575,92.729 159.575,90.625 v1(160.1,90.1) ; v1(164.1,81.6) 165.224,80.475 CN3.187@165.224,78.05
  Bottom Layer w0.15: v1(160.1,90.1) 164.1,86.1 v1(164.1,81.6)
I2C0_SDA_3V3: CN1.3 J2.21 U5.14 | length 78.3
  Top Layer w0.15: U5.14@159.575,98.471 159.575,102.075 v1(159.85,102.35) ; v1(167.6,127.6) 169.599,129.599 CN1.3@169.599,132.662
  Mid-Layer 1 w0.15: v1(159.85,102.35) 198.35,102.35 J2.21@199.37,103.37
  Bottom Layer w0.15: v1(159.85,102.35) 159.85,119.85 v1(167.6,127.6)
I2C1_SCL_1V8: CN3.189 U5.8 | length 17
  Top Layer w0.15: U5.8@160.225,92.729 160.225,90.975 v1(161.1,90.1) ; v1(165.1,81.6) 165.725,80.975 CN3.189@165.725,78.05
  Bottom Layer w0.15: v1(161.1,90.1) 165.1,86.1 v1(165.1,81.6)
I2C1_SCL_3V3: CN2.4 J2.19 U5.13 | length 78.4
  Top Layer w0.15: CN2.4@156.599,132.662 156.599,130.1 v1(164.1,122.6) ; U5.13@160.225,98.471 160.225,101.225 v1(160.6,101.6) ; v1@160.6,101.598 161.1,102.1 198.101,102.099 J2.19@199.371,100.829
  Bottom Layer w0.15: v1(160.6,101.6) 160.6,119.1 v1(164.1,122.6)